# Altium PCB Embedded_TestBed.PcbDoc
Units mm, origin at the board's own origin, x right, y up, seen from the top; angles counter-clockwise.
Board outline 118 x 61.5 mm, 4 copper layers (Top Layer, Inner Layer 1, Inner Layer 2, Bottom Layer), stack 1.545 mm thick; 67 components, 167 nets, 534 pads, 49 vias.
Unrouted connection lines stored in the file: 348.
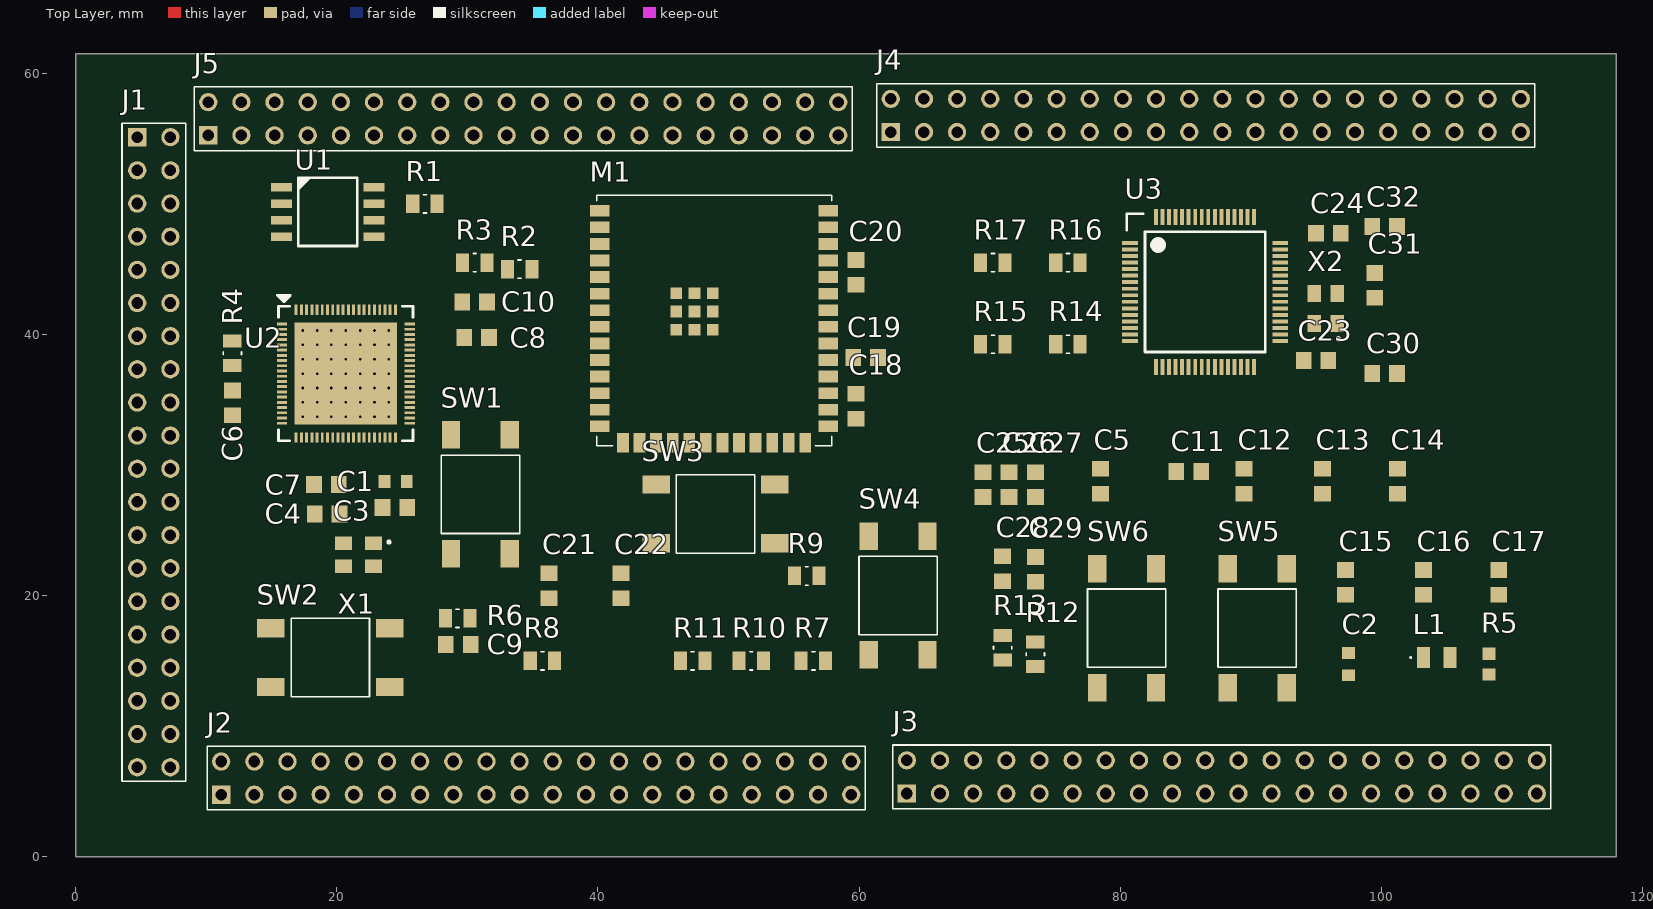
[diagram p0: Top Layer view]
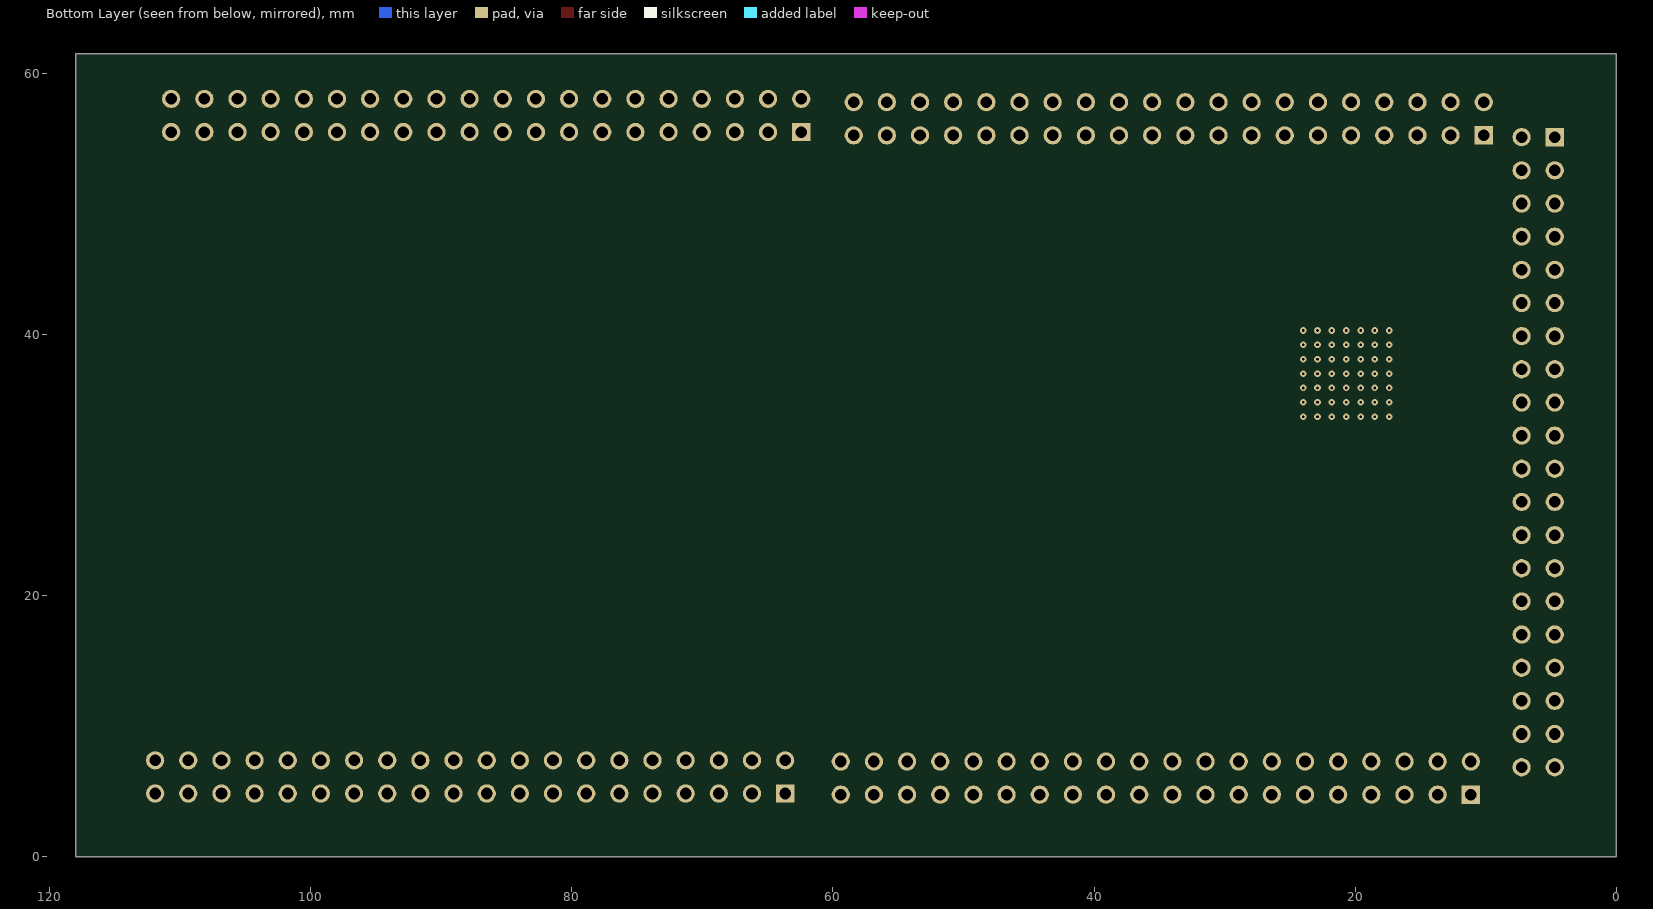
[diagram p1: Bottom Layer view, seen from below]

## Layer stack, top to bottom
Top Solder: solder mask 0.01, Solder Resist, Dk 3.5
Top Layer: signal copper 0.035
Dielectric 1: prepreg 0.12, PP-006, Dk 4.1
Inner Layer 1: signal copper 0.035
Core: core 1.165, FR-4, Dk 4.8
Inner Layer 2: signal copper 0.035
Dielectric 2: prepreg 0.12, PP-006, Dk 4.1
Bottom Layer: signal copper 0.035
Bottom Solder: solder mask 0.01, Solder Resist, Dk 3.5

## Board outline
0,0 118,0 118,61.5 0,61.5

## Design rules (kind name [scope] priority, off if disabled: settings)
Clearance [All] p1: gap=0.254 ignorepadtopadclearanceinfootprint=FALSE
DiffPairsRouting "Schematic Differential Pairs Routing_3" [InNet('NetR17_2')] p1: maxlimit=0.8 minlimit=0.8 mostfreqgap=0.8 toplayer_minwidth=0.254 toplayer_maxwidth=0.254 toplayer_prefwidth=0.254 bottomlayer_minwidth=0.254 bottomlayer_maxwidth=0.254 bottomlayer_prefwidth=0.254 impedanceprofiledriven=TRUE impedanceprofileid={50FBB478-CD75-47A3-B965-6FE381120122} impedanceprofilevalue=90.000000 maxuncoupledlength=12.7
DiffPairsRouting "Schematic Differential Pairs Routing_1" [InNet('NetR16_2')] p2: maxlimit=0.8 minlimit=0.8 mostfreqgap=0.8 toplayer_minwidth=0.254 toplayer_maxwidth=0.254 toplayer_prefwidth=0.254 bottomlayer_minwidth=0.254 bottomlayer_maxwidth=0.254 bottomlayer_prefwidth=0.254 impedanceprofiledriven=TRUE impedanceprofileid={50FBB478-CD75-47A3-B965-6FE381120122} impedanceprofilevalue=90.000000 maxuncoupledlength=12.7
DiffPairsRouting "Schematic Differential Pairs Routing_2" [InNet('NetM1_13')] p3: maxlimit=0.8 minlimit=0.8 mostfreqgap=0.8 toplayer_minwidth=0.254 toplayer_maxwidth=0.254 toplayer_prefwidth=0.254 bottomlayer_minwidth=0.254 bottomlayer_maxwidth=0.254 bottomlayer_prefwidth=0.254 impedanceprofiledriven=TRUE impedanceprofileid={50FBB478-CD75-47A3-B965-6FE381120122} impedanceprofilevalue=90.000000 maxuncoupledlength=12.7
DiffPairsRouting "Schematic Differential Pairs Routing" [InNet('ESP32_USB_DP')] p4: maxlimit=0.8 minlimit=0.8 mostfreqgap=0.8 toplayer_minwidth=0.254 toplayer_maxwidth=0.254 toplayer_prefwidth=0.254 bottomlayer_minwidth=0.254 bottomlayer_maxwidth=0.254 bottomlayer_prefwidth=0.254 impedanceprofiledriven=TRUE impedanceprofileid={50FBB478-CD75-47A3-B965-6FE381120122} impedanceprofilevalue=90.000000 maxuncoupledlength=12.7
DiffPairsRouting [All] p5: maxlimit=0.254 minlimit=0.254 mostfreqgap=0.254 toplayer_minwidth=0.381 toplayer_maxwidth=0.381 toplayer_prefwidth=0.381 midlayer1_minwidth=0.381 midlayer1_maxwidth=0.381 midlayer1_prefwidth=0.381 midlayer2_minwidth=0.381 midlayer2_maxwidth=0.381 midlayer2_prefwidth=0.381 bottomlayer_minwidth=0.381 bottomlayer_maxwidth=0.381 bottomlayer_prefwidth=0.381 maxuncoupledlength=12.7
PolygonConnect [All] p1: connectstyle=Relief reliefconductorwidth=0.254 reliefentries=4 polygonreliefangle="90 Angle" airgapwidth=0.254
RoutingVias [All] p1: holewidth=0.711 width=1.27 viastyle="Through Hole" minholewidth=0.711 minwidth=1.27 maxholewidth=0.711 maxwidth=1.27
SolderMaskExpansion [All] p1: expansion=0.102 istentingtop=FALSE
SupplyNets "Schematic Supply Nets_6" [InNet('1V1')] p1: voltage=0.000
SupplyNets "Schematic Supply Nets_5" [InNet('3V3')] p2: voltage=0.000
SupplyNets "Schematic Supply Nets_3" [InNet('5V0')] p3: voltage=0.000
SupplyNets "Schematic Supply Nets_1" [InNet('GND')] p4: voltage=0.000
Width [All] p1: maxlimit=0.254 minlimit=0.254 preferedwidth=0.254
29 further rules are at their usual default settings.

## Classes and differential pairs
component class MCU3: C23 C24 C25 C26 C27 C28 C29 C30 C31 C32 J3 J4 R12 R13 R16 R17 SW5 SW6 U3 X2
component class MCU2: C18 C19 C20 C21 C22 J2 M1 R7 R8 R9 R10 R11 R14 R15 SW3 SW4
component class MCU1: C1 C2 C3 C4 C5 C6 C7 C8 C9 C10 C11 C12 C13 C14 C15 C16 C17 J1 J5 L1 R1 R2 R3 R4 R5 R6 SW1 SW2 U1 U2 X1

## Components (designator, comment, footprint, x,y, rotation, side; value= is the part's Value field where it differs from the comment)
C1 "ERP_102-1" CAPC1608X10N 24.5,28.75 r0 top value=4u7
C2 "ERP_102-1" CAPC1608X10N 97.5,14.75 r90 top value=4u7
C3 "MLCC_0805" CAPC2012X13L 24.45,26.75 r0 top value=15pF
C4 "MLCC_0805" CAPC2012X13L 19.25,26.25 r0 top value=15pF
C5 "MLCC_0805" CAPC2012X13L 78.5,28.75 r90 top value=100nF
C6 "MLCC_0805" CAPC2012X13L 12,34.75 r270 top value=100nF
C7 "MLCC_0805" CAPC2012X13L 19.2,28.5 r0 top value=100nF
C8 "MLCC_0805" CAPC2012X13L 30.7,39.75 r0 top value=100nF
C9 "MLCC_0805" CAPC2012X13L 29.3,16.25 r0 top value=100nF
C10 "MLCC_0805" CAPC2012X13L 30.55,42.5 r0 top value=100nF
C11 "MLCC_0805" CAPC2012X13L 85.25,29.5 r0 top value=100nF
C12 "MLCC_0805" CAPC2012X13L 89.5,28.75 r90 top value=100nF
C13 "MLCC_0805" CAPC2012X13L 95.5,28.75 r90 top value=100nF
C14 "MLCC_0805" CAPC2012X13L 101.25,28.75 r90 top value=100nF
C15 "MLCC_0805" CAPC2012X13L 97.25,21 r90 top value=100nF
C16 "MLCC_0805" CAPC2012X13L 103.25,21 r90 top value=100nF
C17 "MLCC_0805" CAPC2012X13L 109,21 r90 top value=100nF
C18 "MLCC_0805" CAPC2012X13L 59.75,34.5 r90 top value=1uF
C19 "MLCC_0805" CAPC2012X13L 60.5,38.25 r180 top value=100nF
C20 "MLCC_0805" CAPC2012X13L 59.75,44.75 r90 top value=10nF
C21 "MLCC_0805" CAPC2012X13L 36.25,20.75 r90 top value=33pF
C22 "MLCC_0805" CAPC2012X13L 41.75,20.75 r90 top value=10pF
C23 "MLCC_0805" CAPC2012X13L 95,38 r180 top value=15pF
C24 "MLCC_0805" CAPC2012X13L 95.95,47.75 r180 top value=15pF
C25 "MLCC_0805" CAPC2012X13L 69.5,28.5 r90 top value=4u7
C26 "MLCC_0805" CAPC2012X13L 71.5,28.5 r90 top value=100nF
C27 "MLCC_0805" CAPC2012X13L 73.5,28.5 r90 top value=100nF
C28 "MLCC_0805" CAPC2012X13L 71,22.05 r90 top value=100nF
C29 "MLCC_0805" CAPC2012X13L 73.5,22 r90 top value=100nF
C30 "MLCC_0805" CAPC2012X13L 100.25,36.999 r180 top value=100nF
C31 "MLCC_0805" CAPC2012X13L 99.5,43.749 r90 top value=100nF
C32 "MLCC_0805" CAPC2012X13L 100.25,48.249 r180 top value=100nF
J1 "40PX2R_M_1" 40PX2R_Male_THT 5.98,30.98 r0 top
J2 "40PX2R_M_1" 40PX2R_Male_THT 35.27,6.02 r90 top
J3 "40PX2R_M_1" 40PX2R_Male_THT 87.789,6.108 r90 top
J4 "40PX2R_M_1" 40PX2R_Male_THT 86.56,56.77 r90 top
J5 "40PX2R_M_1" 40PX2R_Male_THT 34.28,56.52 r90 top
L1 "AOTA-B201610S" INDC2016X10M 104.25,15.25 r0 top value=3u3
M1 "ESP32-S3-WROOM" ESP32-S3-WROOM-1U 48.9,40.59 r0 top
R1 "ERP_101-1" RES_0805 26.75,50 r0 top value=27R
R2 "ERP_101-1" RES_0805 34,45 r0 top value=27R
R3 "ERP_101-1" RES_0805 30.565,45.5 r0 top value=1k
R4 "ERP_101-1" RES_0805 12,38.565 r90 top value=1k
R5 "ERP_101-1" RES_0603 108.25,14.75 r90 top value=33R
R6 "ERP_101-1" RES_0805 29.25,18.25 r0 top value=1k
R7 "ERP_101-1" RES_0805 56.499,15 r0 top value=1k
R8 "ERP_101-1" RES_0805 35.75,15 r0 top value=0R
R9 "ERP_101-1" RES_0805 56,21.5 r0 top value=0R
R10 "ERP_101-1" RES_0805 51.75,15 r0 top value=10k
R11 "ERP_101-1" RES_0805 47.25,15 r0 top value=1k
R12 "ERP_101-1" RES_0805 73.5,15.5 r90 top value=0R
R13 "ERP_101-1" RES_0805 71,16 r90 top value=0R
R14 "ERP_101-1" RES_0805 75.999,39.25 r0 top value=0R
R15 "ERP_101-1" RES_0805 70.25,39.25 r0 top value=0R
R16 "ERP_101-1" RES_0805 75.999,45.5 r0 top value=0R
R17 "ERP_101-1" RES_0805 70.25,45.5 r0 top value=0R
SW1 "Generic6X6" Generic6X6 31,27.75 r90 top
SW2 "Generic6X6" Generic6X6 19.5,15.25 r180 top
SW3 "Generic6X6" Generic6X6 49,26.25 r180 top
SW4 "Generic6X6" Generic6X6 63,20 r90 top
SW5 "Generic6X6" Generic6X6 90.5,17.5 r90 top
SW6 "Generic6X6" Generic6X6 80.5,17.5 r90 top
U1 "W25Q128JV" SOIC127P780X195-8N 19.3,49.385 r0 top value=16M
U2 "RP2350B" QFN40P1000X1000X90_HS-81M 20.685,37 r0 top
U3 "STM32G474RE" TSQFP50P1200X1200X160-64L 86.5,43.25 r0 top
X1 "ABM8" ABM8 21.65,23.125 r180 top value=12M
X2 "ABM8" ABM8 95.75,42 r90 top value=12M

## Footprints (in the part's own frame and the unit in brackets; to place one, negate y for a bottom-side part, rotate by r counter-clockwise, add the part's x,y. Pads: shape width x height; smd on the part's side, far side on the other; paste and mask are expansions set on the pad)
40PX2R_Male_THT [mm]
  rect 1.398x1.398 hole 0.89: 1(-1.27,24.13)
  round 1.398 hole 0.89: 2(-1.27,21.59) 3(-1.27,19.05) 4(-1.27,16.51) 5(-1.27,13.97) 6(-1.27,11.43) 7(-1.27,8.89) 8(-1.27,6.35) 9(-1.27,3.81) 10(-1.27,1.27) 11(-1.27,-1.27) 12(-1.27,-3.81) 13(-1.27,-6.35) 14(-1.27,-8.89) 15(-1.27,-11.43) 16(-1.27,-13.97) 17(-1.27,-16.51) 18(-1.27,-19.05) 19(-1.27,-21.59) 20(-1.27,-24.13) 21(1.27,24.13) 22(1.27,21.59) 23(1.27,19.05) 24(1.27,16.51) 25(1.27,13.97) 26(1.27,11.43) 27(1.27,8.89) 28(1.27,6.35) 29(1.27,3.81) 30(1.27,1.27) 31(1.27,-1.27) 32(1.27,-3.81) 33(1.27,-6.35) 34(1.27,-8.89) 35(1.27,-11.43) 36(1.27,-13.97) 37(1.27,-16.51) 38(1.27,-19.05) 39(1.27,-21.59) 40(1.27,-24.13)
  silkscreen extent -2.44,-25.2 2.44,25.2, body extent -2.44,-25.2 2.44,25.2, height 8.14
ABM8 [mm]
  rect 1.3x1.05 smd: 1(-1.15,-0.875) 2(1.15,-0.875) 3(1.15,0.875) 4(-1.15,0.875)
  silkscreen extent -2.44,-1.07 -2.24,-0.87, body extent -1.6,-1.25 1.6,1.25, height 0.7
CAPC1608X10N [mm] "Chip Capacitor, 2-Leads, Body 1.60x0.80mm, IPC Medium Density"
  rect 0.9x1 smd: 1(-0.85,0) 2(0.85,0)
  body extent -0.9,-0.5 0.9,0.5, height 1
CAPC2012X13L [mm] "Chip Capacitor, 2-Leads, Body 2.00x1.25mm, IPC High Density"
  rect 1.2x1.3 smd: 1(-0.95,0) 2(0.95,0)
  body extent -1.05,-0.63 1.05,0.63, height 1.26
ESP32-S3-WROOM-1U [mm] "Bluetooth, WiFi 802.11b/g/n, Bluetooth v5.0 Transceiver Module 2.4GHz Antenna Not Included, U.FL Surface Mount"
  rect 1.5x0.9 smd mask+0.051: 1(-8.75,8.88) 2(-8.75,7.61) 3(-8.75,6.34) 4(-8.75,5.07) 5(-8.75,3.8) 6(-8.75,2.53) 7(-8.75,1.26) 8(-8.75,-0.01) 9(-8.75,-1.28) 10(-8.75,-2.55) 11(-8.75,-3.82) 12(-8.75,-5.09) 13(-8.75,-6.36) 14(-8.75,-7.63) 27(8.75,-7.63) 28(8.75,-6.36) 29(8.75,-5.09) 30(8.75,-3.82) 31(8.75,-2.55) 32(8.75,-1.28) 33(8.75,-0.01) 34(8.75,1.26) 35(8.75,2.53) 36(8.75,3.8) 37(8.75,5.07) 38(8.75,6.34) 39(8.75,7.61) 40(8.75,8.88)
  rect 0.9x1.5 smd mask+0.051: 15(-6.985,-8.88) 16(-5.715,-8.88) 17(-4.445,-8.88) 18(-3.175,-8.88) 19(-1.905,-8.88) 20(-0.635,-8.88) 21(0.635,-8.88) 22(1.905,-8.88) 23(3.175,-8.88) 24(4.445,-8.88) 25(5.715,-8.88) 26(6.985,-8.88)
  rect 0.9x0.9 smd mask+0.051: 41(-2.9,2.56) 42(-1.5,2.56) 43(-0.1,2.56) 44(-2.9,1.16) 45(-1.5,1.16) 46(-0.1,1.16) 47(-2.9,-0.24) 48(-1.5,-0.24) 49(-0.1,-0.24)
  silkscreen extent -9,-9.13 9,10.07, body extent -9,-9.13 9,10.07, height 3.35
Generic6X6 [mm]
  rect 2.1x1.4 smd: 1(-4.55,2.25) 2(4.55,2.25) 3(-4.55,-2.25) 4(4.55,-2.25)
  silkscreen extent -3,-3 3,3, body extent -5,-3 5,3, height 9.5
INDC2016X10M [mm] "Chip Inductor, 2-Leads, Body 2.00x1.60mm, IPC Low Density"
  rect 1x1.6 smd: 1(-1,0) 2(1,0)
  silkscreen extent -2.05,-0.05 -1.95,0.05, body extent -1.4,-0.8 1.4,0.8, height 1.1
QFN40P1000X1000X90_HS-81M [mm] "QFN, 80-Leads, Body 10.00x10.00mm, Pitch 0.40mm, Thermal Pad 7.82x7.82mm, IPC Low Density"
  rect 0.78x0.22 smd mask+0.03: 1(-4.897,3.8) 2(-4.897,3.4) 3(-4.897,3) 4(-4.897,2.6) 5(-4.897,2.2) 6(-4.897,1.8) 7(-4.897,1.4) 8(-4.897,1) 9(-4.897,0.6) 10(-4.897,0.2) 11(-4.897,-0.2) 12(-4.897,-0.6) 13(-4.897,-1) 14(-4.897,-1.4) 15(-4.897,-1.8) 16(-4.897,-2.2) 17(-4.897,-2.6) 18(-4.897,-3) 19(-4.897,-3.4) 20(-4.897,-3.8) 41(4.897,-3.8) 42(4.897,-3.4) 43(4.897,-3) 44(4.897,-2.6) 45(4.897,-2.2) 46(4.897,-1.8) 47(4.897,-1.4) 48(4.897,-1) 49(4.897,-0.6) 50(4.897,-0.2) 51(4.897,0.2) 52(4.897,0.6) 53(4.897,1) 54(4.897,1.4) 55(4.897,1.8) 56(4.897,2.2) 57(4.897,2.6) 58(4.897,3) 59(4.897,3.4) 60(4.897,3.8)
  rect 0.22x0.78 smd mask+0.03: 21(-3.8,-4.897) 22(-3.4,-4.897) 23(-3,-4.897) 24(-2.6,-4.897) 25(-2.2,-4.897) 26(-1.8,-4.897) 27(-1.4,-4.897) 28(-1,-4.897) 29(-0.6,-4.897) 30(-0.2,-4.897) 31(0.2,-4.897) 32(0.6,-4.897) 33(1,-4.897) 34(1.4,-4.897) 35(1.8,-4.897) 36(2.2,-4.897) 37(2.6,-4.897) 38(3,-4.897) 39(3.4,-4.897) 40(3.8,-4.897) 61(3.8,4.897) 62(3.4,4.897) 63(3,4.897) 64(2.6,4.897) 65(2.2,4.897) 66(1.8,4.897) 67(1.4,4.897) 68(1,4.897) 69(0.6,4.897) 70(0.2,4.897) 71(-0.2,4.897) 72(-0.6,4.897) 73(-1,4.897) 74(-1.4,4.897) 75(-1.8,4.897) 76(-2.2,4.897) 77(-2.6,4.897) 78(-3,4.897) 79(-3.4,4.897) 80(-3.8,4.897)
  rect 7.82x7.82 smd mask+0.03: 81(0,0)
  silkscreen extent -5.25,-5.15 5.15,6, body extent -5,-5 5,5, height 0.9
RES_0603 [mm]
  rect 0.94x1.02 smd: 1(-0.79,0) 2(0.79,0)
  body extent -0.8,-0.4 0.8,0.4, height 0.45
RES_0805 [mm]
  rect 1x1.42 smd: 1(-0.935,0) 2(0.935,0)
  silkscreen extent -0.12,-0.7 0.12,0.7, body extent -1,-0.63 1,0.63, height 0.6
SOIC127P780X195-8N [mm]
  rect 1.6x0.65 smd: 1(-3.55,1.905) 2(-3.55,0.635) 3(-3.55,-0.635) 4(-3.55,-1.905) 5(3.55,-1.905) 6(3.55,-0.635) 7(3.55,0.635) 8(3.55,1.905)
  silkscreen extent -2.25,-2.62 2.25,2.62, body extent -3.9,-2.62 3.9,2.62, height 1.95
TSQFP50P1200X1200X160-64L [mm] "TSQFP, 64-Leads, Body 10.00x10.00mm, Pitch 0.50mm, IPC High Density"
  rect 1.2x0.3 smd mask+0.05: 1(-5.75,3.75) 2(-5.75,3.25) 3(-5.75,2.75) 4(-5.75,2.25) 5(-5.75,1.75) 6(-5.75,1.25) 7(-5.75,0.75) 8(-5.75,0.25) 9(-5.75,-0.25) 10(-5.75,-0.75) 11(-5.75,-1.25) 12(-5.75,-1.75) 13(-5.75,-2.25) 14(-5.75,-2.75) 15(-5.75,-3.25) 16(-5.75,-3.75) 33(5.75,-3.75) 34(5.75,-3.25) 35(5.75,-2.75) 36(5.75,-2.25) 37(5.75,-1.75) 38(5.75,-1.25) 39(5.75,-0.75) 40(5.75,-0.25) 41(5.75,0.25) 42(5.75,0.75) 43(5.75,1.25) 44(5.75,1.75) 45(5.75,2.25) 46(5.75,2.75) 47(5.75,3.25) 48(5.75,3.75)
  rect 0.3x1.2 smd mask+0.05: 17(-3.75,-5.75) 18(-3.25,-5.75) 19(-2.75,-5.75) 20(-2.25,-5.75) 21(-1.75,-5.75) 22(-1.25,-5.75) 23(-0.75,-5.75) 24(-0.25,-5.75) 25(0.25,-5.75) 26(0.75,-5.75) 27(1.25,-5.75) 28(1.75,-5.75) 29(2.25,-5.75) 30(2.75,-5.75) 31(3.25,-5.75) 32(3.75,-5.75) 49(3.75,5.75) 50(3.25,5.75) 51(2.75,5.75) 52(2.25,5.75) 53(1.75,5.75) 54(1.25,5.75) 55(0.75,5.75) 56(0.25,5.75) 57(-0.25,5.75) 58(-0.75,5.75) 59(-1.25,5.75) 60(-1.75,5.75) 61(-2.25,5.75) 62(-2.75,5.75) 63(-3.25,5.75) 64(-3.75,5.75)
  silkscreen extent -6,-4.6 4.6,6, body extent -6,-6 6,6, height 1.6

## Part data
C1 C2: library part MLCC_0603, "Chip Capacitor, 2-Leads, Body 1.60x0.80mm, IPC Medium Density", Package=0603
C3 C4 C5 C6 C7 C8 C9 C10 C11 C12 C13 C14 C15 C16 C17 C18 C19 C20 C21 C22 C23 C24 C25 C26 C27 C28 C29 C30 C31 C32: "Chip Capacitor, 2-Leads, Body 2.00x1.25mm, IPC High Density", Package=0805
J1 J2 J3 J4 J5: "Berg Connector Header Through Hole  40 Position 0.100\" (2.54mm)", Manufacturer 1="CNC Tech"
L1: "AOTA-B201610S Abracon 2.0 x 1.6 MM", Manufacturer 1=Abracon, Manufacturer Part Number 1=AOTA-B201610S3R3-101-T, DCR=0.115, ISAT=2.8
M1: "ESP32-S3-WROOM Module", Manufacturer 1="Espressif Systems"
R1 R2 R3 R4 R6 R7 R8 R9 R10 R11 R12 R13 R14 R15 R16 R17: library part RES_0805, "RES_0805", Package=0805
R5: library part RES_0603, "RES_0603", Package=0603
SW1 SW2 SW3 SW4 SW5 SW6: "Tactile Switch SPST-NO Top Actuated Surface Mount", Manufacturer 1=C&K, Package=4.5X4.5
U1: "FLASH - NOR Memory IC SPI - Quad I/O 133 MHz 8-SOIC", Manufacturer 1=Winbond, Manufacturer Part Number 1=W25Q128JVSIQ, Package=8-SOIC
U2: "Dual ARM Cortex M33 - Microcontroller IC 32-Bit 80-QFN (10x10)", Manufacturer 1="Raspberry Pi", Manufacturer Part Number 1=RP2040, Package=QFN56
U3: "512KB 1.71V~3.6V ARM-M4 128KB 170MHz FLASH 52 LQFP-64(10x10) Microcontrollers (MCU/MPU/SOC) ROHS", Manufacturer 1=STMicroelectronics, Manufacturer Part Number 1=STM32G474RET6, Package=LQFP-64(10x10)
X1 X2: "CRYS_L3.2_W2.5", Manufacturer 1="Abracon LLC", Manufacturer Part Number 1=ABM8-272-T3

## Via types
v1: diameter 0.5, hole 0.2, Top Layer to Bottom Layer, 49 vias

## Nets (pads, with @x,y where several pads share a name; then routed paths per layer and width w, separated by ;. In a path a pad name is that pad's centre, name@x,y a point inside that pad or via, vN(x,y) a via of type N, cw(c..) or ccw(c..) an arc to the next point about the centre after c; other vN are vias at no path point)
1V1: U2.10 U2.32 U2.51
3V3: C1.1 C5.1 C6.1 C7.1 C8.1 C9.1 C10.1 C11.1 C12.1 C13.1 C14.1 C15.1 C16.1 C17.1 C18.1 C19.1 C20.1 C21.1 C22.1 C25.1 C26.1 C27.1 C28.1 C29.1 C30.1 C31.1 C32.1 J1.1 J1.9 J2.1 J2.9 J3.1 J3.9 J4.1 J4.9 J5.1 J5.9 M1.2 R5.1 R5.2 R7.2 R10.2 U1.8 U2.5 U2.15 U2.24 U2.29 U2.41 U2.50 U2.59 U2.60 U2.61 U2.64 U2.68 U2.69 U2.76 U3.1 U3.16 U3.28 U3.29 U3.32 U3.48 U3.64
5V0: J1.21 J1.22 J2.21 J2.22 J3.21 J3.22 J4.21 J4.22 J5.21 J5.22
ESP32_BOOT: M1.27 R9.2
ESP32_RESET: M1.3 R7.1 R8.2
ESP32_USB_DN: R14.1
ESP32_USB_DP: R15.1
GND: C1.2 C2.2 C3.2 C4.2 C5.2 C6.2 C7.2 C8.2 C9.2 C10.2 C11.2 C12.2 C13.2 C14.2 C15.2 C16.2 C17.2 C18.2 C19.2 C20.2 C21.2 C22.2 C23.2 C24.2 C25.2 C26.2 C27.2 C28.2 C29.2 C30.2 C31.2 C32.2 J1.5 J1.13 J1.20 J1.23 J1.27 J1.30 J1.35 J1.37 J2.5 J2.13 J2.20 J2.23 J2.27 J2.30 J2.35 J2.37 J3.5 J3.13 J3.20 J3.23 J3.27 J3.30 J3.35 J3.37 J4.5 J4.13 J4.20 J4.23 J4.27 J4.30 J4.35 J4.37 J5.5 J5.13 J5.20 J5.23 J5.27 J5.30 J5.35 J5.37 M1.1 M1.40 M1.41 M1.42 M1.43 M1.44 M1.45 M1.46 M1.47 M1.48 M1.49 R11.2 SW1.3 SW1.4 SW2.3 SW2.4 SW3.3 SW3.4 SW4.3 SW4.4 SW5.3 SW5.4 SW6.3 SW6.4 U1.4 U2.62 U2.81 U3.15 U3.27 U3.31 U3.47 U3.63 X1.2 X1.4 X2.2 X2.4
NetC2_1: C2.1 L1.2 U2.65
NetC3_1: C3.1 U2.30 X1.1
NetC4_1: C4.1 R6.2 X1.3
NetJ1_2: J1.2 U2.1
NetJ1_3: J1.3 U2.2
NetJ1_4: J1.4 U2.3
NetJ1_6: J1.6 U2.4
NetJ1_7: J1.7 U2.6
NetJ1_8: J1.8 U2.7
NetJ1_11: J1.11 U2.8
NetJ1_12: J1.12 U2.9
NetJ1_14: J1.14 U2.11
NetJ1_15: J1.15 U2.12
NetJ1_16: J1.16 U2.13
NetJ1_17: J1.17 U2.14
NetJ1_18: J1.18 U2.16
NetJ1_19: J1.19 U2.17
NetJ1_24: J1.24 U2.37
NetJ1_25: J1.25 U2.36
NetJ1_26: J1.26 U2.28
NetJ1_28: J1.28 J1.29 U2.27
NetJ1_31: J1.31 U2.26
NetJ1_32: J1.32 U2.25
NetJ1_33: J1.33 U2.23
NetJ1_34: J1.34 U2.22
NetJ1_36: J1.36 U2.21
NetJ1_38: J1.38 U2.20
NetJ1_39: J1.39 U2.19
NetJ1_40: J1.40 U2.18
NetJ2_2: J2.2 M1.12
NetJ2_3: J2.3 M1.17
NetJ2_4: J2.4 M1.4
NetJ2_6: J2.6 M1.5
NetJ2_7: J2.7 M1.6
NetJ2_8: J2.8 M1.7
NetJ2_10: J2.10 M1.19
NetJ2_11: J2.11 M1.21
NetJ2_12: J2.12 M1.20
NetJ2_14: J2.14 M1.8
NetJ2_15: J2.15 M1.9
NetJ2_16: J2.16 M1.10
NetJ2_17: J2.17 M1.11
NetJ2_18: J2.18 M1.30
NetJ2_19: J2.19 M1.18
NetJ2_24: J2.24 M1.37
NetJ2_25: J2.25 M1.36
NetJ2_26: J2.26 M1.39
NetJ2_28: J2.28 M1.38
NetJ2_29: J2.29 M1.35
NetJ2_31: J2.31 M1.34
NetJ2_32: J2.32 M1.33
NetJ2_33: J2.33 M1.32
NetJ2_34: J2.34 M1.31
NetJ2_36: J2.36 M1.23
NetJ2_38: J2.38 M1.22
NetJ2_39: J2.39 M1.28
NetJ2_40: J2.40 M1.29
NetJ5_2: J5.2 U2.38
NetJ5_3: J5.3 U2.39
NetJ5_4: J5.4 U2.40
NetJ5_6: J5.6 U2.42
NetJ5_7: J5.7 U2.43
NetJ5_8: J5.8 U2.44
NetJ5_10: J5.10 U2.45
NetJ5_11: J5.11 U2.46
NetJ5_12: J5.12 U2.47
NetJ5_14: J5.14 U2.48
NetJ5_15: J5.15 U2.49
NetJ5_16: J5.16 U2.52
NetJ5_17: J5.17 U2.53
NetJ5_18: J5.18 U2.54
NetJ5_19: J5.19 U2.55
NetJ5_29: J5.29 U2.33
NetJ5_31: J5.31 U2.34
NetJ5_32: J5.32 U2.80
NetJ5_33: J5.33 U2.79
NetJ5_34: J5.34 U2.78
NetJ5_36: J5.36 U2.77
NetJ5_38: J5.38 U2.58
NetJ5_39: J5.39 U2.57
NetJ5_40: J5.40 U2.56
NetL1_1: L1.1 U2.63
NetM1_13: M1.13 R14.2
NetM1_14: M1.14 R15.2
NetM1_15: M1.15 R10.1 R11.1
NetR1_1: R1.1
NetR1_2: R1.2 U2.67
NetR2_1: R2.1
NetR2_2: R2.2 U2.66
NetR3_1: R3.1 SW1.1 SW1.2
NetR4_1: R4.1 SW2.1 SW2.2
NetR6_1: R6.1 U2.31
NetR8_1: R8.1 SW3.1 SW3.2
NetR9_1: R9.1 SW4.1 SW4.2
NetR12_1: R12.1 SW5.1 SW5.2
NetR13_1: R13.1 SW6.1 SW6.2
NetR16_2: R16.2 U3.46
NetR17_2: R17.2 U3.45
NetU2_35: U2.35
RP2040_BOOT: R4.2
RP2040_QSPI_CSN: U1.1 U2.75
RP2040_QSPI_SCLK: U1.6 U2.71
RP2040_QSPI_SD0: U1.5 U2.72
RP2040_QSPI_SD1: U1.2 U2.74
RP2040_QSPI_SD2: U1.3 U2.73
RP2040_QSPI_SD3: U1.7 U2.70
RP2040_RESET: R3.2
STM32_BOOT: R13.2 U3.61
STM32_DM: R17.1
STM32_DP: R16.1
STM32_PA0: J3.8 U3.12
STM32_PA1: J3.10 U3.13
STM32_PA2: J3.11 U3.14
STM32_PA3: J3.12 U3.17
STM32_PA4: J3.14 U3.18
STM32_PA5: J3.15 U3.19
STM32_PA6: J3.16 U3.20
STM32_PA7: J3.17 U3.21
STM32_PA8: J4.4 U3.42
STM32_PA9: J4.3 U3.43
STM32_PA10: J4.2 U3.44
STM32_PA15: J4.6 U3.51
STM32_PB0: J3.38 U3.24
STM32_PB1: J3.39 U3.25
STM32_PB2: J3.40 U3.26
STM32_PB4: J4.16 U3.57
STM32_PB5: J4.15 U3.58
STM32_PB6: J4.14 U3.59
STM32_PB7: J4.12 U3.60
STM32_PB9: J4.11 U3.62
STM32_PB10: J3.36 U3.30
STM32_PB11: J3.34 U3.33
STM32_PB12: J3.33 U3.34
STM32_PB13: J3.32 U3.35
STM32_PB14: J3.31 U3.36
STM32_PB15: J3.29 U3.37
STM32_PC0: J3.3 U3.8
STM32_PC1: J3.4 U3.9
STM32_PC2: J3.6 U3.10
STM32_PC3: J3.7 U3.11
STM32_PC4: J3.18 U3.22
STM32_PC5: J3.19 U3.23
STM32_PC6: J3.28 U3.38
STM32_PC7: J3.26 U3.39
STM32_PC8: J3.25 U3.40
STM32_PC9: J3.24 U3.41
STM32_PC10: J4.10 U3.52
STM32_PC11: J4.8 U3.53
STM32_PC12: J4.7 U3.54
STM32_PC13: J3.2 U3.2
STM32_PC14: J4.18 U3.3
STM32_PC15: J4.19 U3.4
STM32_PD2: J4.17 U3.55
STM32_RESET: R12.2 U3.7
STM32_SWC: J4.25 U3.50
STM32_SWD: J4.24 U3.49
STM32_SWO: J4.26 U3.56
STM32_XTAL_IN: C24.1 U3.5 X2.3
STM32_XTAL_OUT: C23.1 U3.6 X2.1
pads on no net: J1.10 J4.28 J4.29 J4.31 J4.32 J4.33 J4.34 J4.36 J4.38 J4.39 J4.40 J5.24 J5.25 J5.26 J5.28 M1.16 M1.24 M1.25 M1.26
copper on no net:
  other v1: 17.385,33.7 18.485,33.7 19.585,33.7 20.685,33.7 21.785,33.7 22.885,33.7 23.985,33.7 17.385,34.8 18.485,34.8 19.585,34.8 20.685,34.8 21.785,34.8 22.885,34.8 23.985,34.8 17.385,35.9 18.485,35.9 19.585,35.9 20.685,35.9 21.785,35.9 22.885,35.9 23.985,35.9 17.385,37 18.485,37 19.585,37 20.685,37 21.785,37 22.885,37 23.985,37 17.385,38.1 18.485,38.1 19.585,38.1 20.685,38.1 21.785,38.1 22.885,38.1 23.985,38.1 17.385,39.2 18.485,39.2 19.585,39.2 20.685,39.2 21.785,39.2 22.885,39.2 23.985,39.2 17.385,40.3 18.485,40.3 19.585,40.3 20.685,40.3 21.785,40.3 22.885,40.3 23.985,40.3